# Altium PCB board.PcbDoc (part 3 of 3)
Units mil, origin at the board's own origin, x right, y up, seen from the top; angles counter-clockwise.
Board outline 6000 x 4000 mil, 2 copper layers (Top Layer, Bottom Layer); 112 components, 157 nets, 575 pads, 180 vias.
Unrouted connection lines stored in the file: 1.
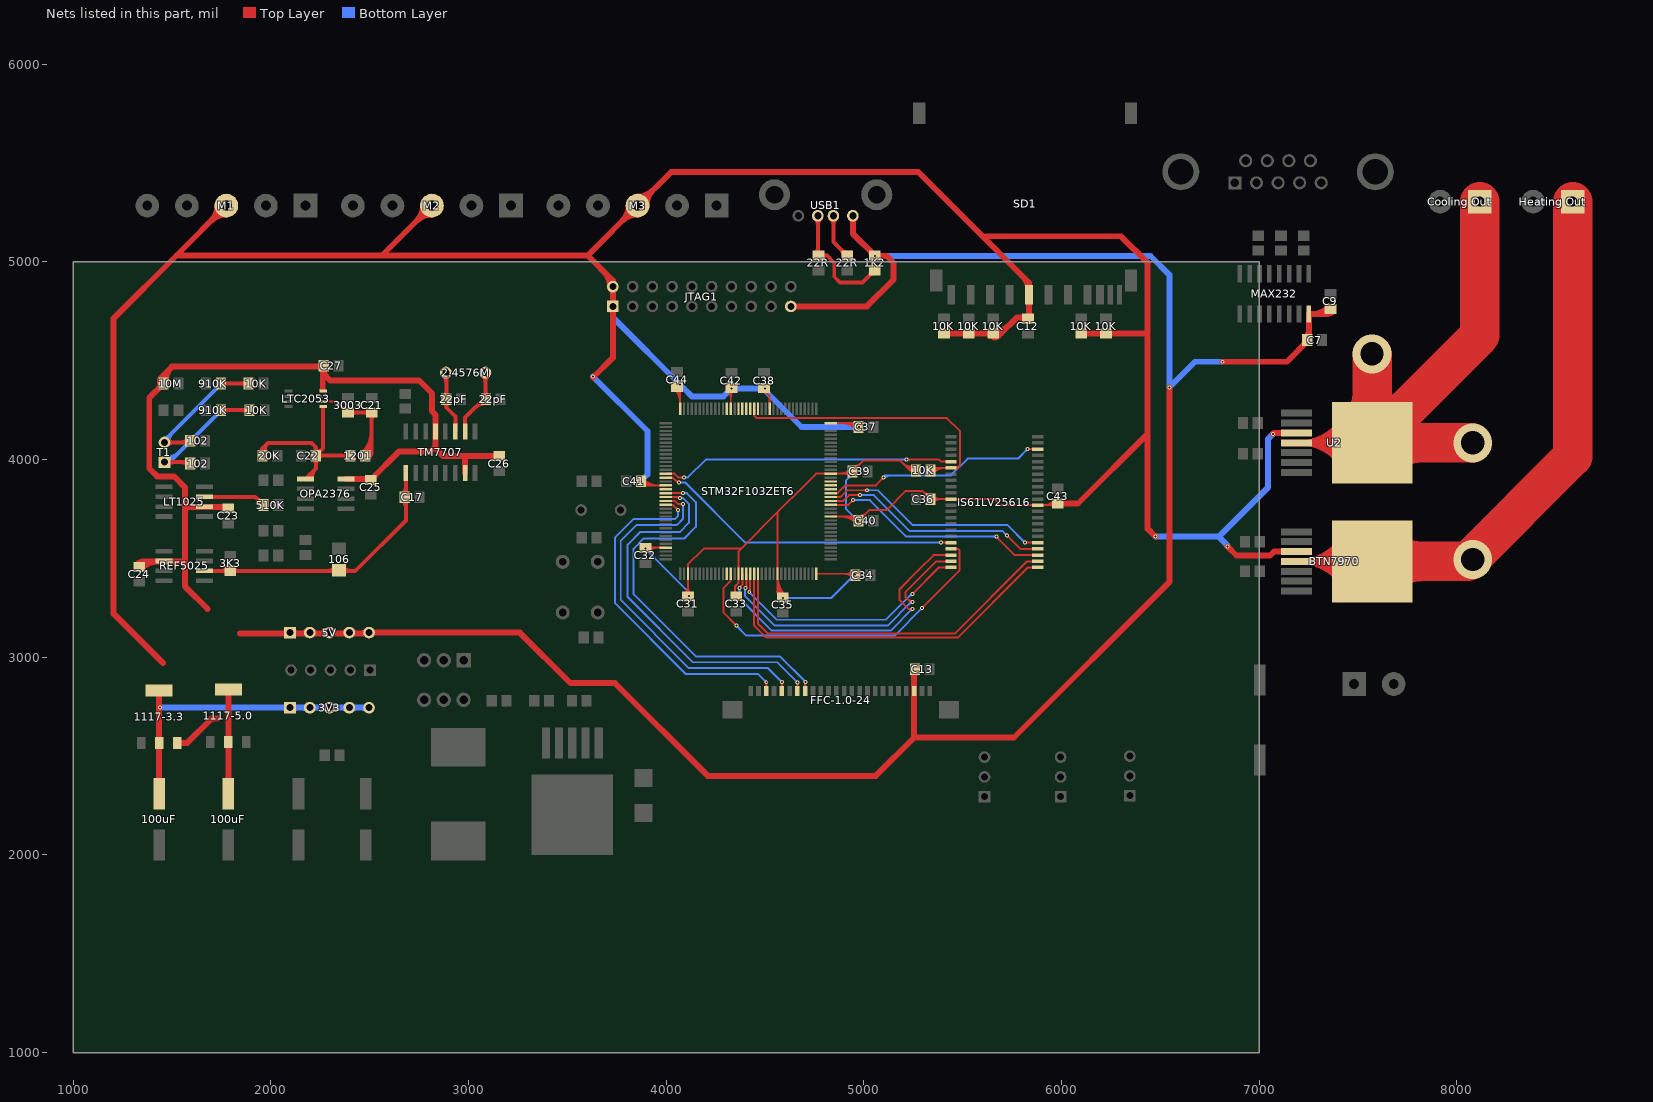
[diagram p3: the nets of this part, all layers, seen from the top]

## Via types
v1: diameter 20, hole 10, Top Layer to Bottom Layer, 173 vias
v2: diameter 196.85, hole 118.11, Top Layer to Bottom Layer, 7 vias

## Nets (pads, with @x,y where several pads share a name; then routed paths per layer and width w, separated by ;. In a path a pad name is that pad's centre, name@x,y a point inside that pad or via, vN(x,y) a via of type N, cw(c..) or ccw(c..) an arc to the next point about the centre after c; other vN are vias at no path point) (continued)
PF4: IS61LV25616.5 STM32F103ZET6.14 | length 1582.5
  Top Layer w10: STM32F103ZET6.14@3997.68,3928.58 4041.42,3928.58 4060,3910 v1(4090,3910) ; v1@4086.46,3906.46 ccw(c4077.93,3897.93) 4077.93,3910 ccw(c4077.93,3922.07) v1@4086.46,3913.54 ; v1(5215,4000) 5380,4000 5390.28,3989.72 IS61LV25616.5@5440.51,3989.72 ; v1@5218.54,3996.46 cw(c5227.07,3987.93) 5227.07,4000 cw(c5227.07,4012.07) v1@5218.54,4003.54 ; IS61LV25616.5@5418.1,3987 ccw(c5411.51,3980.41) 5411.51,3989.72 ccw(c5411.51,3999.04) IS61LV25616.5@5418.1,3992.45
  Bottom Layer w10: v1(4090,3910) 4110,3910 4200,4000 v1(5215,4000) ; v1@4093.54,3906.46 cw(c4102.07,3897.93) 4102.07,3910 cw(c4102.07,3922.07) v1@4093.54,3913.54 ; v1@5211.46,3996.46 ccw(c5202.93,3987.93) 5202.93,4000 ccw(c5202.93,4012.07) v1@5211.46,4003.54
PF5: IS61LV25616.18 STM32F103ZET6.15 | length 1691.1
  Top Layer w10: STM32F103ZET6.15@3997.68,3908.9 4032.36,3908.9 4056.26,3885 v1(4065,3885) ; STM32F103ZET6.15@4023.49,3908.02 cw(c4026.99,3894.42) 4036.91,3904.35 ; 4041.55,3899.71 ccw(c4065,3923.17) v1@4065,3890 ; v1(5390.28,3580.28) IS61LV25616.18@5440.51,3580.28 ; v1@5393.81,3576.74 cw(c5402.35,3568.2) 5402.35,3580.28 cw(c5402.35,3592.35) v1@5393.81,3583.81 ; IS61LV25616.18@5418.1,3577.55 ccw(c5411.51,3570.96) 5411.51,3580.28 ccw(c5411.51,3589.59) IS61LV25616.18@5418.1,3583
  Bottom Layer w10: v1(4065,3885) 4095,3885 4399.72,3580.28 v1(5390.28,3580.28) ; v1@4068.54,3881.46 cw(c4077.07,3872.93) 4077.07,3885 cw(c4077.07,3897.07) v1@4068.54,3888.54 ; v1@5386.74,3576.74 ccw(c5378.2,3568.2) 5378.2,3580.28 ccw(c5378.2,3592.35) v1@5386.74,3583.81
PF6: STM32F103ZET6.18
PF7: FFC-1.0-24.8 STM32F103ZET6.19 | length 2082.5
  Top Layer w10: STM32F103ZET6.19@3997.68,3830.16 4084.84,3830.16 v1(4085,3830) ; 4072.55,3830.16 cw(c4072.55,3817.55) v1@4081.46,3826.46 ; 4073.31,3830.16 ccw(c4073.31,3841.69) v1@4081.46,3833.54 ; FFC-1.0-24.8@4698.18,2847.57 ccw(c4686.55,2859.2) 4702.99,2859.2 ccw(c4719.44,2859.2) FFC-1.0-24.8@4707.81,2847.57 ; FFC-1.0-24.8@4702.99,2828.98 v1@4702.99,2872.99 ; 4702.99,2858.08 cw(c4721.92,2858.08) v1@4708.54,2871.46
  Bottom Layer w10: v1(4085,3830) 4105,3830 4150,3785 4150,3660 4090,3600 3885,3600 3835,3550 3835,3320 4150,3005 4575,3005 v1(4705,2875) ; v1@4088.54,3826.46 cw(c4097.07,3817.93) 4097.07,3830 cw(c4097.07,3842.07) v1@4088.54,3833.54 ; v1@4700,2875 ccw(c4687.93,2875) 4696.46,2883.54 ccw(c4705,2892.07) v1@4705,2880
PF8: FFC-1.0-24.7 STM32F103ZET6.20 | length 2037
  Top Layer w10: STM32F103ZET6.20@3997.68,3810.47 4064.53,3810.47 v1(4070,3805) ; 4044.72,3810.47 cw(c4044.72,3779.72) v1@4066.46,3801.46 ; FFC-1.0-24.7@4658.81,2847.57 ccw(c4647.18,2859.2) 4663.62,2859.2 ccw(c4680.07,2859.2) FFC-1.0-24.7@4668.44,2847.57 ; v1@4660.09,2870.09 cw(c4651.55,2861.55) 4663.62,2861.55 cw(c4675.69,2861.55) v1@4667.16,2870.09 ; FFC-1.0-24.7@4663.62,2828.98 v1(4663.62,2873.62)
  Bottom Layer w10: v1(4070,3805) 4086.11,3805 4115,3776.11 4115,3680 4070,3635 3870,3635 3805,3570 3805,3305 4135,2975 4562.24,2975 v1(4663.62,2873.62) ; v1@4073.54,3801.46 cw(c4082.07,3792.93) 4082.07,3805 cw(c4082.07,3817.07) v1@4073.54,3808.54 ; v1@4658.62,2873.62 ccw(c4646.55,2873.62) 4655.09,2882.16 ccw(c4663.62,2890.69) v1@4663.62,2878.62
PF9: FFC-1.0-24.5 STM32F103ZET6.21 | length 1964.1
  Top Layer w10: STM32F103ZET6.21@3997.68,3790.79 4044.21,3790.79 4060,3775 v1(4085,3775) ; v1@4081.46,3771.46 ccw(c4072.93,3762.93) 4072.93,3775 ccw(c4072.93,3787.07) v1@4081.46,3778.54 ; FFC-1.0-24.5@4580.07,2847.57 ccw(c4568.44,2859.2) 4584.88,2859.2 ccw(c4601.33,2859.2) FFC-1.0-24.5@4589.7,2847.57 ; v1@4581.46,2871.46 cw(c4573.21,2863.21) 4584.88,2863.21 ; FFC-1.0-24.5@4584.88,2828.98 4584.88,2874.88 v1(4585,2875) ; 4584.88,2862.64 cw(c4597.36,2862.64) v1@4588.54,2871.46
  Bottom Layer w10: v1@4081.46,3771.46 cw(c4072.93,3762.93) 4085,3762.93 cw(c4097.07,3762.93) v1@4088.54,3771.46 ; v1(4085,3775) 4085,3700 4055,3670 3850,3670 3770,3590 3770,3290 4115,2945 4515,2945 v1(4585,2875) ; v1@4580,2875 ccw(c4567.93,2875) 4576.46,2883.54 ccw(c4585,2892.07) v1@4585,2880
PF10: FFC-1.0-24.3 STM32F103ZET6.22 | length 1894.6
  Top Layer w10: STM32F103ZET6.22@3997.68,3771.1 4033.9,3771.1 v1(4060,3745) ; STM32F103ZET6.22@4023.48,3770.22 cw(c4027.39,3753.96) 4039.21,3765.79 ; v1@4055,3745 ccw(c4042.93,3745) 4051.46,3753.54 ccw(c4060,3762.07) v1@4060,3750 ; FFC-1.0-24.3@4501.33,2847.57 ccw(c4489.7,2859.2) 4506.14,2859.2 ccw(c4522.59,2859.2) FFC-1.0-24.3@4510.96,2847.57 ; v1@4502.61,2870.32 cw(c4494.07,2861.79) 4506.14,2861.79 cw(c4518.21,2861.79) v1@4509.68,2870.32 ; FFC-1.0-24.3@4506.14,2828.98 v1(4506.14,2873.86)
  Bottom Layer w10: v1@4056.46,3741.46 cw(c4047.93,3732.93) 4060,3732.93 cw(c4072.07,3732.93) v1@4063.54,3741.46 ; v1(4060,3745) 4060,3715 4045,3700 3835,3700 3740,3605 3740,3275 4100,2915 4465,2915 v1(4506.14,2873.86) ; v1@4501.14,2873.86 ccw(c4489.07,2873.86) 4497.61,2882.39 ccw(c4506.14,2890.93) v1@4506.14,2878.86
PF11: STM32F103ZET6.49
PF12: IS61LV25616.19 STM32F103ZET6.50 | length 1842.9
  Top Layer w10: STM32F103ZET6.50@4326.42,3422.68 4326.42,3387.99 4290,3351.57 4290,3225.51 v1(4355.51,3160) ; v1@4350.51,3160 ccw(c4338.44,3160) 4346.97,3168.54 ccw(c4355.51,3177.07) v1@4355.51,3165 ; v1(5295,3250) 5405,3360 ; v1@5295,3255 ccw(c5295,3267.07) 5303.54,3258.54 ccw(c5312.07,3250) v1@5300,3250 ; 5415,3370 5405,3360 ; IS61LV25616.19@5440.51,3548.78 5476.22,3548.78 5483,3542 5483,3438 5405,3360 ; IS61LV25616.19@5462.93,3546.05 cw(c5469.51,3539.47) 5469.51,3548.78 cw(c5469.51,3558.09) IS61LV25616.19@5462.93,3551.51
  Bottom Layer w10: v1@4355.51,3155 cw(c4355.51,3142.93) 4364.04,3151.46 cw(c4372.58,3160) v1@4360.51,3160 ; v1(4355.51,3160) 4405.51,3110 5155,3110 v1(5295,3250) ; v1@5290,3250 cw(c5277.93,3250) 5286.46,3241.46 cw(c5295,3232.93) v1@5295,3245
PF13: IS61LV25616.20 STM32F103ZET6.53 | length 1686.1
  Top Layer w10: v1(4370,3351.11) 4385.47,3366.58 STM32F103ZET6.53@4385.47,3422.68 ; v1@4370,3356.11 ccw(c4370,3368.18) 4378.54,3359.65 ccw(c4387.07,3351.11) v1@4375,3351.11 ; v1@5241.46,3241.46 ccw(c5232.93,3232.93) 5232.93,3245 ccw(c5232.93,3257.07) v1@5241.46,3248.54 ; v1(5245,3245) 5225,3245 5180,3290 5180,3345 5280,3445 ; 5275,3440 5280,3445 ; IS61LV25616.20@5418.1,3514.56 ccw(c5411.51,3507.97) 5411.51,3517.28 ccw(c5411.51,3526.6) IS61LV25616.20@5418.1,3520.01 ; IS61LV25616.20@5440.51,3517.28 5352.28,3517.28 5280,3445
  Bottom Layer w10: v1@4366.46,3347.58 cw(c4357.93,3339.04) 4370,3339.04 cw(c4382.07,3339.04) v1@4373.54,3347.58 ; v1(4370,3351.11) 4370,3300 4535,3135 5135,3135 v1(5245,3245) ; v1@5240,3245 cw(c5227.93,3245) 5236.46,3236.46 cw(c5245,3227.93) v1@5245,3240
PF14: IS61LV25616.21 STM32F103ZET6.54 | length 1519.8
  Top Layer w10: v1(4400,3350) 4405.16,3355.16 STM32F103ZET6.54@4405.16,3422.68 ; 5219.39,3295.61 ccw(c5245,3321.21) v1@5245,3285 ; v1(5245,3280) 5235,3280 5210,3305 5210,3330 5310,3430 ; 5305,3425 5310,3430 ; IS61LV25616.21@5418.1,3483.06 ccw(c5411.51,3476.47) 5411.51,3485.79 ccw(c5411.51,3495.1) IS61LV25616.21@5418.1,3488.52 ; IS61LV25616.21@5440.51,3485.79 5365.79,3485.79 5310,3430
  Bottom Layer w10: 4398,3333.1 cw(c4416.9,3333.1) v1@4403.54,3346.46 ; v1@4398,3348 4398,3312 4550,3160 5120,3160 5240,3280 v1(5245,3280) ; 5227.93,3267.93 cw(c5245,3250.86) v1@5245,3275
PF15: IS61LV25616.22 STM32F103ZET6.55 | length 1438
  Top Layer w10: v1@4416.46,3333.54 ccw(c4396.24,3353.76) 4424.84,3353.76 ; v1(4420,3330) 4424.84,3334.84 STM32F103ZET6.55@4424.84,3422.68 ; 5275,3350 v1(5245,3320) 5379.29,3454.29 IS61LV25616.22@5440.51,3454.29 ; IS61LV25616.22@5418.1,3451.56 ccw(c5411.51,3444.98) 5411.51,3454.29 ccw(c5411.51,3463.61) IS61LV25616.22@5418.1,3457.02 ; 5253.54,3328.54 ccw(c5262.07,3320) 5250,3320 cw(c5262.07,3320) 5253.54,3328.54 ; 5253.54,3328.54 cw(c5245,3337.07) 5245,3325 ccw(c5245,3337.07) 5253.54,3328.54
  Bottom Layer w10: v1@4420,3325 cw(c4420,3312.93) 4428.54,3321.46 cw(c4437.07,3330) v1@4425,3330 ; v1(4420,3330) 4560,3190 5110,3190 5240,3320 v1(5245,3320) ; 5227.93,3307.93 cw(c5245,3290.86) v1@5245,3315
PG0: IS61LV25616.23 STM32F103ZET6.56 | length 1882.9
  Top Layer w10: 4444.53,3160.47 STM32F103ZET6.56@4444.53,3422.68 ; 4445,3160 4505,3100 5475,3100 5829.29,3454.29 IS61LV25616.23@5879.49,3454.29 ; IS61LV25616.23@5857.07,3451.56 ccw(c5850.49,3444.98) 5850.49,3454.29 ccw(c5850.49,3463.61) IS61LV25616.23@5857.07,3457.02
PG1: IS61LV25616.24 STM32F103ZET6.57 | length 1849.1
  Top Layer w10: STM32F103ZET6.57@4464.21,3422.68 4464.21,3170.79 4515,3120 5460,3120 5825,3485 5878.7,3485 IS61LV25616.24@5879.49,3485.79 ; 5848.59,3485 ccw(c5848.59,3497) IS61LV25616.24@5857.07,3488.52
PG2: IS61LV25616.25 STM32F103ZET6.87 | length 1262.6
  Top Layer w10: STM32F103ZET6.87@4832.32,3771.1 4921.1,3771.1 v1(4945,3795) ; v1@4940,3795 cw(c4927.93,3795) 4936.46,3786.46 cw(c4945,3777.93) v1@4945,3790 ; v1@5670,3605 cw(c5670,3592.93) 5678.54,3601.46 cw(c5687.07,3610) v1@5675,3610 ; v1(5670,3610) 5762.72,3517.28 IS61LV25616.25@5879.49,3517.28 ; IS61LV25616.25@5857.07,3514.56 ccw(c5850.49,3507.97) 5850.49,3517.28 ccw(c5850.49,3526.6) IS61LV25616.25@5857.07,3520.01
  Bottom Layer w10: v1(4945,3795) 5030,3795 5215,3610 v1(5670,3610) ; v1@4948.54,3791.46 cw(c4957.07,3782.93) 4957.07,3795 cw(c4957.07,3807.07) v1@4948.54,3798.54 ; v1@5666.46,3606.46 ccw(c5657.93,3597.93) 5657.93,3610 ccw(c5657.93,3622.07) v1@5666.46,3613.54
PG3: IS61LV25616.26 STM32F103ZET6.88 | length 1262.1
  Top Layer w10: STM32F103ZET6.88@4832.32,3790.79 4895.79,3790.79 4925,3820 v1(4980,3820) ; v1@4976.46,3816.46 ccw(c4967.93,3807.93) 4967.93,3820 ccw(c4967.93,3832.07) v1@4976.46,3823.54 ; v1@5725,3610 cw(c5725,3597.93) 5733.54,3606.46 cw(c5742.07,3615) v1@5730,3615 ; v1(5725,3615) 5791.22,3548.78 IS61LV25616.26@5879.49,3548.78 ; IS61LV25616.26@5857.07,3546.05 ccw(c5850.49,3539.47) 5850.49,3548.78 ccw(c5850.49,3558.09) IS61LV25616.26@5857.07,3551.51
  Bottom Layer w10: v1(4980,3820) 5050,3820 5230,3640 5700,3640 v1(5725,3615) ; v1@4983.54,3816.46 cw(c4992.07,3807.93) 4992.07,3820 cw(c4992.07,3832.07) v1@4983.54,3823.54 ; v1@5720,3615 ccw(c5707.93,3615) 5716.46,3623.54 ccw(c5725,3632.07) v1@5725,3620
PG4: IS61LV25616.27 STM32F103ZET6.89 | length 1261.4
  Top Layer w10: STM32F103ZET6.89@4832.32,3810.47 4880.47,3810.47 4915,3845 v1(5015,3845) ; v1@5011.46,3841.46 ccw(c5002.93,3832.93) 5002.93,3845 ccw(c5002.93,3857.07) v1@5011.46,3848.54 ; v1@5815.28,3580.28 IS61LV25616.27@5879.49,3580.28 ; v1@5818.54,3576.46 cw(c5827.74,3567.26) 5827.74,3580.28 ; v1@5818.54,3583.54 ccw(c5826.4,3591.4) 5826.4,3580.28 ; IS61LV25616.27@5857.07,3577.55 ccw(c5850.49,3570.96) 5850.49,3580.28 ccw(c5850.49,3589.59) IS61LV25616.27@5857.07,3583
  Bottom Layer w10: v1(5015,3845) 5070,3845 5245,3670 5725,3670 v1(5815,3580) ; v1@5018.54,3841.46 cw(c5027.07,3832.93) 5027.07,3845 cw(c5027.07,3857.07) v1@5018.54,3848.54 ; v1@5810,3580 ccw(c5797.93,3580) 5806.46,3588.54 ccw(c5815,3597.07) v1@5815,3585
PG5: IS61LV25616.42 STM32F103ZET6.90 | length 1292.3
  Top Layer w10: STM32F103ZET6.90@4832.32,3830.16 4834.1,3831.94 4868.79,3831.94 ; STM32F103ZET6.90@4858.42,3830.91 ccw(c4862.98,3837.75) 4868.79,3831.94 ; STM32F103ZET6.90@4858.55,3829.52 cw(c4864.39,3823.68) 4864.39,3831.94 ; 5055,3870 5045,3870 ; v1@5095,3910 cw(c5082.93,3910) 5091.46,3901.46 cw(c5100,3892.93) v1@5100,3905 ; v1(5100,3910) 5060,3870 5045,3870 ; v1(5827.28,4052.72) IS61LV25616.42@5879.49,4052.72 ; v1@5830.82,4049.18 cw(c5839.36,4040.64) 5839.36,4052.72 cw(c5839.36,4064.79) v1@5830.82,4056.25 ; IS61LV25616.42@5857.07,4049.99 ccw(c5850.49,4043.4) 5850.49,4052.72 ccw(c5850.49,4062.03) IS61LV25616.42@5857.07,4055.44 ; 4868.79,3831.94 4906.85,3870 5045,3870
  Bottom Layer w10: v1@5096.46,3913.54 cw(c5112.07,3897.93) 5112.07,3920 ; v1(5100,3910) 5110,3920 5440,3920 5525,4005 5779.57,4005 v1(5827.28,4052.72) ; v1@5103.54,3906.46 cw(c5136.21,3873.79) 5136.21,3920 ; v1@5822.28,4052.72 cw(c5810.21,4052.72) 5818.75,4044.18 cw(c5827.28,4035.64) v1@5827.28,4047.72
PG6: STM32F103ZET6.91
PG7: STM32F103ZET6.92
PG8: STM32F103ZET6.93
PG9: STM32F103ZET6.124
PG10: 10K.2@5337.4,3945 IS61LV25616.6 STM32F103ZET6.125 | length 1664.4
  Top Layer w10: STM32F103ZET6.125@4443.89,4231.09 cw(c4438.05,4225.25) 4446.31,4225.25 ; STM32F103ZET6.125@4444.53,4257.32 4446.31,4255.54 4446.31,4220.86 4457.16,4210 5420,4210 5485,4145 5485,3970 ; 10K.2@5337.4,3945 5350.63,3958.23 IS61LV25616.6@5440.51,3958.23 5473.23,3958.23 5485,3970 ; 10K.2@5337.82,3948.52 cw(c5361.26,3925.08) 10K.2@5361.26,3958.23 ; 10K.2@5344.89,3941.45 cw(c5385.4,3900.94) 5385.4,3958.23 ; 10K.2@5351.96,3934.38 cw(c5409.54,3876.8) 5409.54,3958.23 ; 10K.2@5351.96,3963.5 ccw(c5364.68,3976.22) 5364.68,3958.23 ; IS61LV25616.6@5418.1,3955.5 ccw(c5411.51,3948.91) 5411.51,3958.23 ccw(c5411.51,3967.54) IS61LV25616.6@5418.1,3960.96 ; IS61LV25616.6@5459.28,3952.16 ccw(c5461.33,3965.69) 5471.01,3956.01 ; IS61LV25616.6@5460.78,3962.04 ccw(c5465.02,3989.98) 5485,3970 ; IS61LV25616.6@5462.93,3955.5 cw(c5469.51,3948.91) 5469.51,3958.23 cw(c5469.51,3967.54) IS61LV25616.6@5462.93,3960.96
PG11: STM32F103ZET6.126
PG12: STM32F103ZET6.127
PG13: STM32F103ZET6.128
PG14: STM32F103ZET6.129
PG15: STM32F103ZET6.132
PWR: 
RED: 10K.1@1892.6,4250 102.2@1592.6,3980 910K.1@1747.4,4250 T1.1 | length 1058
  Top Layer w20: T1.1@1462,3987 1585.6,3987 102.2@1592.6,3980 ; T1.1@1475.81,3973.19 cw(c1509.14,3939.86) 1509.14,3987 cw(c1509.14,4034.14) T1.1@1475.81,4000.81 ; 1547.56,3987 cw(c1547.56,3938.9) 102.2@1581.57,3972.91 ; 1562.35,3987 ccw(c1562.35,4014.18) 102.2@1581.57,3994.96 ; 910K.1@1747.4,4250 10K.1@1892.6,4250 ; 910K.1@1758.43,4238.98 cw(c1785.04,4212.36) 1785.04,4250 cw(c1785.04,4287.64) 910K.1@1758.43,4261.02 ; 10K.1@1881.57,4238.98 ccw(c1854.96,4212.36) 1854.96,4250 ccw(c1854.96,4287.64) 10K.1@1881.57,4261.02
  Bottom Layer w20: T1.1@1462,3986.53 ccw(c1462,4045.74) 1503.87,4003.87 ; T1.1@1462,3987 1487,3987 v1(1750,4250) ; T1.1@1462,4006.53 ccw(c1462,4114.03) 1538.01,4038.01
REF: 20K.1 1201.1 C22.1 LTC2053.5 OPA2376.1 | length 1473.8
  Top Layer w20: 20K.1@1947.52,4035.83 ccw(c1929.06,4057.6) 1957.6,4057.6 ; 20K.1@1953.44,4022.47 cw(c1989.8,4035.28) 1962.54,4062.54 ; 20K.1@1957.6,4020 1957.6,4057.6 ; 20K.1@1967.68,4035.83 cw(c1986.14,4057.6) 1957.6,4057.6 ; 20K.1@1972.3,4029.12 cw(c2023.02,4046.98) 1985,4085 ; OPA2376.1@2174.64,3902 2227.4,3954.76 ; OPA2376.1@2188,3900.6 cw(c2217.78,3902.9) 2196.66,3924.02 ; OPA2376.1@2207.94,3902.14 cw(c2274.86,3907.3) 2227.4,3954.76 ; C22.1@2216.38,4005.04 cw(c2189.76,3978.42) 2227.4,3978.42 cw(c2265.04,3978.42) C22.1@2238.43,4005.04 ; C22.1@2216.38,4034.96 ccw(c2189.76,4061.58) 2227.4,4061.58 ccw(c2265.04,4061.58) C22.1@2238.43,4034.96 ; C22.1@2227.4,4039.53 ccw(c2227.4,4086.67) 2260.74,4053.34 ; C22.1@2238.43,4008.98 cw(c2265.04,3982.36) 2265.04,4020 cw(c2265.04,4057.64) C22.1@2238.43,4031.02 ; C22.1@2242.99,4023.94 cw(c2271.13,4023.94) C22.1@2251.23,4043.83 ; 2265,4260 2265,4057.6 C22.1@2227.4,4020 ; 1201.1@2391.57,4008.98 ccw(c2364.96,3982.36) 2364.96,4020 ccw(c2364.96,4057.64) 1201.1@2391.57,4031.02 ; 1201.1@2402.6,4020 C22.1@2227.4,4020 ; 1957.6,4057.6 1985,4085 ; 1985,4085 2205,4085 2227.4,4062.6 C22.1@2227.4,4020 ; 2227.4,3954.76 C22.1@2227.4,4020
RG: 1201.2 3003.1 C21.2 LTC2053.6 | length 1077.9
  Top Layer w10: LTC2053.6@2265,4294.8 2332.8,4294.8 3003.1@2390,4237.6 ; 2348.13,4279.47 cw(c2306.26,4237.6) 3003.1@2365.47,4237.6 ; 2357.63,4269.96 ccw(c2386.06,4298.39) 3003.1@2386.06,4258.19 ; 3003.1@2365.2,4262.4 cw(c2340.4,4237.6) 3003.1@2375.47,4237.6
  Top Layer w20: 3003.1@2390,4237.6 C21.2@2510,4237.6 2510,4052.6 ; 3003.1@2404.96,4226.57 cw(c2431.58,4199.96) 2431.58,4237.6 cw(c2431.58,4275.24) 3003.1@2404.96,4248.62 ; 1201.2@2466.38,4034.96 ccw(c2361.06,4140.27) 2510,4140.27 ; 1201.2@2477.4,4020 2510,4052.6 ; 1201.2@2477.67,4039.53 ccw(c2478.43,4084.17) 2510,4052.6 ; 1201.2@2480.52,4020.82 ccw(c2409.35,4091.99) 2510,4091.99 ; 1201.2@2492.99,4023.94 cw(c2521.13,4023.94) 1201.2@2501.23,4043.83 ; 1201.2@2494.66,4006.68 ccw(c2457.63,4043.71) 2510,4043.71 ; C21.2@2495.04,4226.57 ccw(c2468.42,4199.96) 2468.42,4237.6 ccw(c2468.42,4275.24) C21.2@2495.04,4248.62 ; C21.2@2498.98,4226.57 cw(c2472.36,4199.96) 2510,4199.96 cw(c2547.64,4199.96) C21.2@2521.02,4226.57
T_D_O: "Cooling Out.1" U2.4 U2.8 | length 6074.6
  Top Layer w20: U2.4@7188.46,4085 U2.8@7571.34,4085 ; U2.4@7254.94,4079.54 cw(c7268.12,4066.37) 7268.12,4085 cw(c7268.12,4103.63) U2.4@7254.94,4090.46 ; U2.8@7416.49,3970.2 ccw(c7188.49,3801.17) U2.4@7188.46,4085 ccw(c7188.49,4368.83) U2.8@7416.49,4199.8 ; U2.8@7432.56,3982.11 ccw(c7228.21,3830.62) 7228.21,4085 ccw(c7228.21,4339.38) U2.8@7432.56,4187.89 ; U2.8@7448.63,3994.03 ccw(c7267.93,3860.07) 7267.93,4085 ccw(c7267.93,4309.93) U2.8@7448.63,4175.97 ; U2.8@7464.69,4005.94 ccw(c7307.66,3889.52) 7307.66,4085 ccw(c7307.66,4280.48) U2.8@7464.69,4164.06 ; U2.8@7480.76,4017.85 ccw(c7347.38,3918.97) 7347.38,4085 ccw(c7347.38,4251.03) U2.8@7480.76,4152.15
  Top Layer w200: U2.8@7498.68,4161.6 ccw(c7323.26,4337.01) 7571.34,4337.01 ccw(c7819.41,4337.01) U2.8@7644,4161.6 ; U2.8@7571.34,4191.69 ccw(c7571.34,4449.27) U2.8@7753.47,4267.14 ; v2@7571.34,4531.34 U2.8@7571.34,4085 ; U2.8@7644,4012.34 cw(c7819.41,3836.93) 7819.41,4085 cw(c7819.41,4333.07) U2.8@7644,4157.66 ; U2.8@7674.09,4088.94 cw(c7912.66,4088.94) U2.8@7743.97,4257.63 ; v2@8075,4085 U2.8@7571.34,4085 ; 8115,5305 8115,4628.66 U2.8@7571.34,4085
  other v2: 8080,4085 7570,4535
T_U_O: "Heating Out.1" BTN7970.4 BTN7970.8 | length 5423.3
  Top Layer w20: BTN7970.4@7188.46,3485 BTN7970.8@7571.34,3485 ; BTN7970.4@7254.94,3479.54 cw(c7268.12,3466.37) 7268.12,3485 cw(c7268.12,3503.63) BTN7970.4@7254.94,3490.46 ; BTN7970.8@7416.49,3370.2 ccw(c7188.49,3201.17) BTN7970.4@7188.46,3485 ccw(c7188.49,3768.83) BTN7970.8@7416.49,3599.8 ; BTN7970.8@7432.56,3382.11 ccw(c7228.21,3230.62) 7228.21,3485 ccw(c7228.21,3739.38) BTN7970.8@7432.56,3587.89 ; BTN7970.8@7448.63,3394.03 ccw(c7267.93,3260.07) 7267.93,3485 ccw(c7267.93,3709.93) BTN7970.8@7448.63,3575.97 ; BTN7970.8@7464.69,3405.94 ccw(c7307.66,3289.52) 7307.66,3485 ccw(c7307.66,3680.48) BTN7970.8@7464.69,3564.06 ; BTN7970.8@7480.76,3417.85 ccw(c7347.38,3318.97) 7347.38,3485 ccw(c7347.38,3651.03) BTN7970.8@7480.76,3552.15
  Top Layer w200: BTN7970.8@7571.34,3485 8055,3485 8585,4015 8585,5305 ; BTN7970.8@7644,3412.34 cw(c7819.41,3236.93) 7819.41,3485 cw(c7819.41,3733.07) BTN7970.8@7644,3557.66
  other v2: 8080,3495
USB_D+: 1K2.2 22R.2@4770,5032.4 USB1.3 | length 1065.4
  Top Layer w20: 22R.2@4755.04,5043.43 ccw(c4726.24,5072.23) 4766.97,5072.23 ; 4766.97,5067.86 ccw(c4801.52,5067.86) 22R.2@4777.09,5043.43 ; 4766.97,5104.37 USB1.3@4766.97,5233.31 4766.97,5035.43 22R.2@4770,5032.4 4812.6,5032.4 4850,4995 4850,4925 4880,4895 4992.4,4895 1K2.2@5055,4957.6 ; 22R.2@4784.96,5021.38 cw(c4811.58,4994.76) 4811.58,5032.4 cw(c4811.58,5070.04) 22R.2@4784.96,5043.43 ; 5021.66,4924.26 ccw(c4988.33,4957.6) 1K2.2@5035.47,4957.6 ; 1K2.2@5031.17,4933.77 cw(c5051.06,4913.87) 1K2.2@5051.06,4942.01 ; 4766.97,5186.16 ccw(c4719.82,5186.16) 4753.16,5219.5 cw(c4719.82,5186.16) 4766.97,5186.16 ; 4766.97,5186.16 cw(c4814.11,5186.16) 4780.78,5219.5 ccw(c4814.11,5186.16) 4766.97,5186.16
USB_D-: 22R.2@4915,5032.4 USB1.2 | length 385
  Top Layer w20: USB1.2@4831.9,5219.5 cw(c4798.56,5186.16) 4845.71,5186.16 cw(c4892.85,5186.16) USB1.2@4859.52,5219.5 ; USB1.2@4845.71,5233.31 4845.71,5101.69 22R.2@4915,5032.4 22R.2@4930.71,5048.11 ; 4881.66,5065.74 cw(c4848.33,5032.4) 22R.2@4895.47,5032.4 ; 22R.2@4891.17,5056.23 ccw(c4911.06,5076.13) 22R.2@4911.06,5047.99
VCC: 1K2.1 5V.1 5V.2 5V.3 5V.4 5V.5 10M.2@1457.6,4385 100uF.1@1785,2310 1117-3.3.3 1117-5.0.2 1117-5.0.4 C7.2 C9.1 C13.2 C23.2 C24.2 C25.2 C26.2 C27.2 FFC-1.0-24.22 JTAG1.10 LT1025.2 LTC2053.8 MAX232.16 OPA2376.8 REF5025.2 TM7707.5 TM7707.15 USB1.1 | length 18087.6
  Top Layer w30: C24.2@1325.21,3471.13 cw(c1358.71,3437.63) 1358.71,3485 ; C24.2@1335,3457.4 1362.6,3485 1565,3485 ; C24.2@1346.43,3449.91 cw(c1431.13,3365.21) REF5025.2@1431.13,3485 ; C24.2@1349.53,3457.4 cw(c1384.6,3457.4) C24.2@1359.8,3482.2 ; 10M.2@1432.8,4360.2 cw(c1457.6,4335.4) 10M.2@1457.6,4370.47 ; 10M.2@1438.2,4388.27 cw(c1482.55,4389.79) 1451.17,4421.17 ; 10M.2@1468.18,4389.3 cw(c1576.96,4393.03) 1500,4470 ; 1117-3.3.3@1525.55,2567.13 1577.13,2567.13 1700,2690 1730,2690 ; 1680,3245 1565,3360 1565,3485 ; 1737.15,3760 cw(c1737.15,3708.49) C23.2@1773.57,3744.91 ; 1117-5.0.4@1774.03,2826.91 cw(c1747.55,2800.43) 1785,2800.43 cw(c1822.45,2800.43) 1117-5.0.4@1795.97,2826.91 ; 100uF.1@1774.73,2369.49 ccw(c1749.93,2394.29) 1785,2394.29 ccw(c1820.07,2394.29) 100uF.1@1795.27,2369.49 ; 100uF.1@1785,2310 1117-5.0.2@1785,2572.13 1117-5.0.4@1785,2837.87 ; C23.2@1785,3752.4 1777.4,3760 1565,3760 ; 1845,3120 5V.4@2415,3120 ; 2049.75,3120 ccw(c2049.75,3172.14) 5V.1@2086.62,3135.27 ; 5V.1@2107.16,3135.27 ccw(c2144.03,3172.14) 2144.03,3120 ; 2149.75,3120 ccw(c2149.75,3172.14) 5V.2@2186.62,3135.27 ; 5V.2@2207.16,3135.27 ccw(c2244.03,3172.14) 2244.03,3120 ; 2239.46,4470 ccw(c2239.46,4499.2) C27.2@2260.11,4478.55 ; 2249.75,3120 ccw(c2249.75,3172.14) 5V.3@2286.62,3135.27 ; 2260,4355 2262.6,4357.6 2262.6,4470 1500,4470 ; 2262.6,4433.42 cw(c2305.24,4433.42) C27.2@2275.09,4463.57 ; C27.2@2267.6,4475 2267.6,4432.4 2300,4400 2750,4400 2815,4335 2815,4245 2833,4227 TM7707.5@2833,4143.32 2833,4068 ; C27.2@2276.35,4465.11 ccw(c2306.16,4444.82) 2280.67,4419.33 ; 5V.3@2296.89,3120 2491.89,3120 5V.5@2496.89,3125 2690,3125 ; OPA2376.8@2379.36,3902 2509.6,3902 2647.6,4040 2805,4040 2833,4068 ; 5V.4@2407.16,3135.27 ccw(c2444.03,3172.14) 2444.03,3120 ; 2449.75,3120 ccw(c2449.75,3172.14) 5V.5@2486.62,3135.27 ; 2464.39,3902 cw(c2464.39,3860.73) C25.2@2493.57,3889.91 ; 5V.5@2507.16,3114.73 cw(c2531.96,3089.93) 2531.96,3125 cw(c2531.96,3160.07) 5V.5@2507.16,3135.27 ; C25.2@2519.53,3897.4 cw(c2554.6,3897.4) C25.2@2529.8,3922.2 ; 2615,3125 2690,3125 ; TM7707.15@2983,3932.69 2983,4015.4 2985,4017.4 ; C26.2@3155,4017.4 2985,4017.4 ; JTAG1.10@4630,4775 5015,4775 5150,4910 5150,4995 5115,5030 5057.4,5030 1K2.1@5055,5032.4 4944.13,5143.27 USB1.1@4944.13,5233.31 ; JTAG1.10@4640.27,4764.73 cw(c4665.07,4739.93) 4665.07,4775 cw(c4665.07,4810.07) JTAG1.10@4640.27,4785.27 ; USB1.1@4933.86,5223.04 cw(c4909.06,5198.24) 4944.13,5198.24 cw(c4979.21,5198.24) USB1.1@4954.41,5223.04 ; 1K2.1@5030.2,5057.2 cw(c5005.4,5032.4) 1K2.1@5040.47,5032.4 ; 1K2.1@5066.43,5039.89 ccw(c5090.3,5063.77) 5090.3,5030 ; 5254.17,2902.23 cw(c5291.43,2902.23) C13.2@5265.09,2928.57 ; C13.2@5254.17,2936.58 FFC-1.0-24.22@5254.17,2828.98 5254.17,2594.17 ; v1(6545,4365) 6545,3380 5759.17,2594.17 5254.17,2594.17 ; v1(6815,4495) 7140,4495 7251,4606 MAX232.16@7251,4735.64 ; C7.2@7222.07,4577.07 ccw(c7198.07,4601.06) C7.2@7232.01,4601.06 ; C7.2@7235.11,4616.43 ccw(c7196.75,4654.79) 7251,4654.79 ; MAX232.16@7255,4735.64 7333.04,4735.64 C9.1@7360,4762.6 ; 7265.41,4735.64 ccw(c7265.41,4853.25) C9.1@7348.57,4770.09 ; C9.1@7335.2,4737.8 ccw(c7310.4,4762.6) C9.1@7345.47,4762.6 ; 7337.83,4735.64 ccw(c7337.83,4780.83) C9.1@7369.79,4748.87 ; 1500,4470 1457.6,4427.6 10M.2@1457.6,4385 1385,4312.4 1385,3955 1425,3915 1510,3915 1565,3860 1565,3760 ; 1565,3485 1565,3760 ; 2690,3125 3260,3125 3515,2870 3740,2870 4210,2400 5060,2400 5254.17,2594.17 ; 2833,4068 2833,4057 2872.6,4017.4 2985,4017.4 ; 5V.3@2307.16,3135.27 ccw(c2344.03,3172.14) 2344.03,3120 cw(c2344.03,3172.14) 5V.3@2307.16,3135.27 ; 2349.75,3120 ccw(c2349.75,3172.14) 2386.62,3135.27 cw(c2349.75,3172.14) 2349.75,3120
  Bottom Layer w30: v1(5055,5030) 6450,5030 6545,4935 v1(6545,4365) 6675,4495 v1(6815,4495)
VDD: 3V3.1 3V3.2 3V3.3 3V3.4 3V3.5 10K.1@5262.6,3945 10K.2@5405,4637.6 10K.2@5530,4637.6 10K.2@5655,4637.6 10K.2@6100,4637.6 10K.2@6225,4637.6 100uF.1@1435,2310 1117-3.3.2 1117-3.3.4 BTN7970.3 C12.2 C31.2 C32.2 C33.2 C34.2 C35.2 C36.2 C37.2 C38.2 C39.2 C40.2 C41.2 C42.2 C43.2 C44.2 IS61LV25616.11 IS61LV25616.33 JTAG1.1 JTAG1.11 M1.3 M2.3 M3.3 SD1.4 STM32F103ZET6.17 STM32F103ZET6.33 STM32F103ZET6.39 STM32F103ZET6.52 STM32F103ZET6.62 STM32F103ZET6.72 STM32F103ZET6.84 STM32F103ZET6.95 STM32F103ZET6.108 STM32F103ZET6.121 STM32F103ZET6.131 STM32F103ZET6.144 U2.3 | length 27999.5
  Top Layer w10: C41.2@3870,3885 cw(c3870,3867.13) C41.2@3882.64,3879.77 ; C41.2@3872.4,3890 3892.87,3869.53 STM32F103ZET6.17@3997.68,3869.53 ; C41.2@3872.82,3886.48 ccw(c3913.75,3927.41) 3913.75,3869.53 ; C41.2@3879.89,3893.55 ccw(c3937.89,3951.55) 3937.89,3869.53 ; C41.2@3886.96,3900.62 ccw(c3962.03,3975.69) 3962.03,3869.53 ; C32.2@3890.83,3547.23 ccw(c3877.16,3538.16) 3877.16,3554.57 STM32F103ZET6.33@3997.68,3554.57 ; C32.2@3898.54,3546.46 cw(c3918.09,3526.91) C32.2@3918.09,3554.57 ; C32.2@3906.43,3544.91 cw(c3929.73,3521.61) 3929.73,3554.57 ; C32.2@3913.5,3537.84 cw(c3953.87,3497.47) 3953.87,3554.57 ; C32.2@3913.5,3566.96 ccw(c3943.42,3596.89) 3943.42,3554.57 ; C44.2@4044.38,4353.04 cw(c3981.28,4289.94) 4070.51,4289.94 ; C44.2@4051.45,4360.11 cw(c4005.42,4314.09) 4070.51,4314.09 ; C44.2@4058.52,4367.18 cw(c4029.57,4338.23) 4070.51,4338.23 ; STM32F103ZET6.144@4070.51,4257.32 C44.2@4070.51,4343.11 ; C31.2@4095.44,3321.96 ccw(c4060.57,3356.83) 4109.88,3356.83 ; C31.2@4109.88,3307.52 STM32F103ZET6.39@4109.88,3422.68 4109.88,3469.88 4190,3550 4380,3550 ; 4109.88,3333.25 ccw(c4135.85,3333.25) C31.2@4117.49,3314.89 ; 4109.88,3334.43 ccw(c4139.43,3334.43) C31.2@4118.54,3313.54 ; 4109.88,3357.4 ccw(c4159.99,3357.4) C31.2@4124.56,3321.96 ; C42.2@4311.5,4348.04 cw(c4275.5,4312.03) 4326.42,4312.03 ; C42.2@4318.57,4355.11 cw(c4299.64,4336.17) 4326.42,4336.17 ; STM32F103ZET6.131@4326.42,4257.32 C42.2@4326.42,4359.02 ; 4326.42,4313.75 cw(c4374.92,4313.75) C42.2@4340.62,4348.04 ; C42.2@4326.42,4339.28 cw(c4350.72,4339.28) C42.2@4333.54,4356.46 ; C33.2@4355,3307.4 4348,3314.4 4348,3360.23 4365.79,3378.01 STM32F103ZET6.52@4365.79,3422.68 4365.79,3535.79 4380,3550 ; C38.2@4495,4362.6 4495,4350 4523.27,4321.73 STM32F103ZET6.121@4523.27,4257.32 ; C38.2@4495.03,4360.5 ccw(c4515.19,4358.47) C38.2@4500.86,4344.14 ; C38.2@4504.97,4359.5 ccw(c4542.28,4355.74) 4515.77,4329.23 ; C38.2@4506.89,4355.6 ccw(c4516.8,4346.88) C38.2@4507.46,4337.54 ; C38.2@4514.39,4348.99 ccw(c4524.82,4339.82) 4515,4330 ; 4562.64,3336.24 ccw(c4619.9,3336.24) C35.2@4579.41,3295.75 ; 4562.64,3360.38 ccw(c4644.04,3360.38) C35.2@4586.48,3302.82 ; 4562.64,3384.52 ccw(c4668.18,3384.52) C35.2@4593.55,3309.89 ; STM32F103ZET6.62@4562.64,3408.66 ccw(c4692.33,3408.66) C35.2@4600.62,3316.96 ; C35.2@4566.4,3308.52 ccw(c4544.32,3315.38) 4560.67,3331.73 ccw(c4582.13,3353.19) C35.2@4584.48,3322.93 ; C35.2@4579.77,3312.64 cw(c4567.13,3300) C35.2@4585,3300 ; C35.2@4590,3302.4 4562.64,3329.76 STM32F103ZET6.62@4562.64,3422.68 4562.64,3732.64 ; 4690,3860 4700,3870 ; STM32F103ZET6.72@4759.49,3422.68 4949.92,3422.68 C34.2@4957.6,3415 ; STM32F103ZET6.84@4832.32,3712.05 C40.2@4950.55,3712.05 ; STM32F103ZET6.108@4832.32,4184.49 4885,4184.49 ; 4874.83,3928.58 ccw(c4874.83,4003.83) C39.2@4928.04,3950.62 ; 4879.16,3712.05 cw(c4879.16,3600.5) C40.2@4958.04,3679.38 ; 4885.34,4184.49 cw(c4885.34,4081.68) C37.2@4958.04,4154.38 ; 4898.86,3422.68 cw(c4898.86,3360.2) C34.2@4943.04,3404.38 ; 4898.97,3928.58 ccw(c4898.97,3979.69) C39.2@4935.11,3943.55 ; 4902.21,3928.58 cw(c4902.21,3887.21) C39.2@4931.46,3916.46 ; 4903.31,3712.05 cw(c4903.31,3624.65) C40.2@4965.11,3686.45 ; 4909.49,4184.49 cw(c4909.49,4105.83) C37.2@4965.11,4161.45 ; 4910.95,3928.58 cw(c4910.95,3904.41) C39.2@4928.04,3921.5 ; 4916.92,3422.68 ccw(c4916.92,3459.62) C34.2@4943.04,3433.5 ; 4923,3422.68 cw(c4923,3384.34) C34.2@4950.11,3411.45 ; 4923.11,4184.49 4885,4184.49 ; C39.2@4926.35,3928.58 cw(c4926.35,3911.35) C39.2@4938.54,3923.54 ; 4927.45,3712.05 cw(c4927.45,3648.79) C40.2@4972.18,3693.52 ; C39.2@4931.18,3928.58 STM32F103ZET6.95@4832.32,3928.58 4758.58,3928.58 4700,3870 ; 4933.63,4184.49 cw(c4933.63,4129.97) C37.2@4972.18,4168.52 ; C34.2@4936.46,3422.68 cw(c4936.46,3401.46) C34.2@4951.46,3416.46 ; C39.2@4942.6,3940 4997.6,3995 5185,3995 5235,3945 ; C39.2@4942.6,3954.53 ccw(c4942.6,3989.6) C39.2@4967.4,3964.8 ; C39.2@4942.6,3964.53 ccw(c4942.6,4023.74) 4984.47,3981.87 ; C40.2@4951.59,3712.05 cw(c4951.59,3672.93) C40.2@4979.25,3700.59 ; C39.2@4963.19,3943.94 cw(c5003.39,3943.94) 4974.96,3972.37 ; C40.2@4970,3695 ccw(c4970,3713.34) C40.2@4982.97,3700.37 ; C40.2@4972.6,3690 5027.6,3745 5115,3745 5211.53,3841.53 5295.87,3841.53 C36.2@5337.4,3800 ; C40.2@4972.6,3704.53 ccw(c4972.6,3739.6) C40.2@4997.4,3714.8 ; C40.2@4972.6,3714.53 ccw(c4972.6,3773.74) 5014.47,3731.87 ; C37.2@4973.11,4184.49 4885,4184.49 ; C40.2@4993.19,3693.94 cw(c5033.39,3693.94) 5004.96,3722.37 ; 5200.77,3979.23 ccw(c5236.35,4014.81) 10K.1@5254.98,3968.07 ; 5211.51,3968.49 ccw(c5242.47,3999.45) 10K.1@5258.68,3958.78 ; 5222.25,3957.75 ccw(c5248.59,3984.09) 10K.1@5262.38,3949.49 ; 5232.99,3947.01 ccw(c5254.71,3968.73) 10K.1@5266.08,3940.2 ; 10K.1@5242.86,3939.14 ccw(c5235,3936.8) 5235,3945 ; 10K.1@5242.86,3950.86 cw(c5235,3953.2) 5235,3945 ; 10K.1@5262.6,3945 5235,3945 ; 5297.84,3839.56 ccw(c5334.29,3876) C36.2@5336.51,3824.51 ; 5305.04,3832.37 cw(c5276.61,3803.94) C36.2@5316.81,3803.94 ; C36.2@5313.93,3823.48 ccw(c5335.62,3845.17) C36.2@5336.95,3814.52 ; C36.2@5338.15,3800.75 IS61LV25616.11@5440.51,3800.75 5659.25,3800.75 5690.75,3769.25 IS61LV25616.33@5879.49,3769.25 C43.2@5971.65,3769.25 ; C36.2@5344.89,3792.51 cw(c5364.78,3772.63) 5364.78,3800.75 ; C36.2@5351.96,3785.44 cw(c5388.92,3748.48) 5388.92,3800.75 ; C36.2@5351.96,3814.56 ccw(c5385.31,3847.9) 5385.31,3800.75 ; IS61LV25616.11@5418.1,3798.02 ccw(c5411.51,3791.43) 5411.51,3800.75 ccw(c5411.51,3810.06) IS61LV25616.11@5418.1,3803.48 ; IS61LV25616.11@5462.93,3798.02 cw(c5469.51,3791.43) 5469.51,3800.75 cw(c5469.51,3810.06) IS61LV25616.11@5462.93,3803.48 ; IS61LV25616.33@5857.07,3766.52 ccw(c5850.49,3759.94) 5850.49,3769.25 ccw(c5850.49,3778.57) IS61LV25616.33@5857.07,3771.98 ; IS61LV25616.33@5901.9,3766.52 cw(c5908.49,3759.94) 5908.49,3769.25 cw(c5908.49,3778.57) IS61LV25616.33@5901.9,3771.98 ; IS61LV25616.33@5906.2,3769.25 ccw(c5906.2,3847.46) C43.2@5961.5,3792.16 ; 5930.35,3769.25 ccw(c5930.35,3823.31) C43.2@5968.57,3785.09 ; 5946.5,3769.25 cw(c5946.5,3748.04) C43.2@5961.5,3763.04 ; 4380,3550 4562.64,3732.64 ; 4562.64,3732.64 4700,3870
  Top Layer w30: 1117-3.3.4@1424.03,2821.91 cw(c1397.55,2795.43) 1435,2795.43 cw(c1472.45,2795.43) 1117-3.3.4@1445.97,2821.91 ; 100uF.1@1424.73,2369.49 ccw(c1399.93,2394.29) 1435,2394.29 ccw(c1470.07,2394.29) 100uF.1@1445.27,2369.49 ; 100uF.1@1430,2310 1435,2315 1117-3.3.2@1435,2567.13 1117-3.3.4@1435,2832.87 ; 1455,2970 1205,3220 1205,4715 1522.5,5032.5 ; M1.3@1730,5285 cw(c1621.36,5285) 1698.18,5208.18 cw(c1775,5131.36) M1.3@1775,5240 ; M1.3@1775,5285 1522.5,5032.5 ; M2.3@2770,5285 cw(c2661.36,5285) 2738.18,5208.18 cw(c2815,5131.36) M2.3@2815,5240 ; M2.3@2815,5285 2562.5,5032.5 ; v1@3630,4415 3730,4515 JTAG1.1@3730,4775 JTAG1.11@3730,4875 3730,4905 ; 3683.99,4951.01 cw(c3607.97,4875) JTAG1.11@3715.47,4875 ; JTAG1.1@3719.73,4764.73 cw(c3694.93,4739.93) 3730,4739.93 cw(c3765.07,4739.93) JTAG1.1@3740.27,4764.73 ; JTAG1.1@3719.73,4785.27 ccw(c3694.93,4810.07) 3730,4810.07 ccw(c3765.07,4810.07) JTAG1.1@3740.27,4785.27 ; JTAG1.11@3719.73,4864.73 cw(c3694.93,4839.93) 3730,4839.93 cw(c3765.07,4839.93) JTAG1.11@3740.27,4864.73 ; JTAG1.11@3720.99,4886.4 ccw(c3706.29,4905) 3730,4905 ; JTAG1.11@3739.01,4886.4 cw(c3753.71,4905) 3730,4905 ; M3.3@3810,5285 cw(c3701.36,5285) 3778.18,5208.18 cw(c3855,5131.36) M3.3@3855,5240 ; M3.3@3855,5330 ccw(c3855,5438.64) 3931.82,5361.82 ccw(c4008.64,5285) M3.3@3900,5285 ; 10K.2@5405,4637.6 10K.2@5530,4637.6 10K.2@5655,4637.6 5692.6,4637.6 5775,4720 5822.4,4720 C12.2@5830,4712.4 5835.28,4717.68 SD1.4@5835.28,4835 5835.28,4894.72 5600,5130 ; 10K.2@5658.94,4618.19 ccw(c5658.94,4652.59) 10K.2@5683.27,4628.27 ; 10K.2@5658.94,4648.19 ccw(c5658.94,4755.02) 5734.48,4679.48 ; 5782.15,4720 cw(c5782.15,4668.49) C12.2@5818.57,4704.91 ; 5805.93,4924.07 cw(c5746.38,4864.53) SD1.4@5830.59,4864.53 ; C12.2@5826.45,4719.89 ccw(c5805.14,4741.2) 5835.28,4741.2 ; C43.2@5980,3777.6 6082.6,3777.6 6435,4130 ; 10K.2@6100,4637.6 10K.2@6225,4637.6 6435,4637.6 ; v1(6475,3610) 6435,3650 6435,4130 ; v1(6840,3560) 6885,3515 7055,3515 7075,3535 BTN7970.3@7188.46,3535 ; v1(7070,4130) 7075,4135 U2.3@7188.46,4135 ; 1522.5,5032.5 2562.5,5032.5 ; 2562.5,5032.5 3602.5,5032.5 ; 3602.5,5032.5 3730,4905 ; 3602.5,5032.5 M3.3@3855,5285 4025,5455 5275,5455 5600,5130 ; 5600,5130 6300,5130 6435,4995 6435,4637.6 ; 6435,4130 6435,4637.6
  Bottom Layer w10: v1@3895,3545 cw(c3895,3532.93) 3903.54,3541.46 cw(c3912.07,3550) v1@3900,3550 ; v1(3895,3550) 4115,3330 v1(4115,3310) ; v1@4111.46,3313.54 ccw(c4102.93,3322.07) 4115,3322.07 ccw(c4127.07,3322.07) v1@4118.54,3313.54 ; v1(4590,3300) 4835,3300 v1(4955,3420) ; v1@4593.54,3296.46 cw(c4602.07,3287.93) 4602.07,3300 cw(c4602.07,3312.07) v1@4593.54,3303.54 ; v1@4930,3920 cw(c4917.93,3920) 4926.46,3911.46 cw(c4935,3902.93) v1@4935,3915 ; v1(4935,3920) 4910,3895 4910,3750 v1(4970,3690) ; v1@4950,3420 cw(c4937.93,3420) 4946.46,3411.46 cw(c4955,3402.93) v1@4955,3415 ; v1@4965,3690 ccw(c4952.93,3690) 4961.46,3698.54 ccw(c4970,3707.07) v1@4970,3695
  Bottom Layer w30: v1(1440,2745) 3V3.2@2215,2745 ; 3V3.1@2086.62,2734.73 ccw(c2061.82,2709.93) 2061.82,2745 ccw(c2061.82,2780.07) 3V3.1@2086.62,2755.27 ; 3V3.1@2096.89,2745 3V3.2@2196.89,2745 3V3.3@2296.89,2745 3V3.4@2396.89,2745 3V3.5@2496.89,2745 ; 3V3.2@2207.16,2734.73 cw(c2231.96,2709.93) 2231.96,2745 cw(c2231.96,2780.07) 3V3.2@2207.16,2755.27 ; 3V3.3@2286.62,2734.73 ccw(c2261.82,2709.93) 2261.82,2745 ccw(c2261.82,2780.07) 3V3.3@2286.62,2755.27 ; 3V3.3@2307.16,2734.73 cw(c2331.96,2709.93) 2331.96,2745 cw(c2331.96,2780.07) 3V3.3@2307.16,2755.27 ; 3V3.4@2386.62,2734.73 ccw(c2361.82,2709.93) 2361.82,2745 ccw(c2361.82,2780.07) 3V3.4@2386.62,2755.27 ; 3V3.4@2407.16,2734.73 cw(c2431.96,2709.93) 2431.96,2745 cw(c2431.96,2780.07) 3V3.4@2407.16,2755.27 ; 3V3.5@2486.62,2734.73 ccw(c2461.82,2709.93) 2461.82,2745 ccw(c2461.82,2780.07) 3V3.5@2486.62,2755.27 ; v1(3630,4420) 3905,4145 3905,3925 v1(3870,3890) ; JTAG1.1@3719.73,4764.73 cw(c3694.93,4739.93) 3730,4739.93 cw(c3765.07,4739.93) JTAG1.1@3740.27,4764.73 ; JTAG1.1@3730,4775 3730,4720 4090,4360 4130,4320 4290,4320 v1(4330,4360) v1(4500,4360) 4500,4349.75 4684.75,4165 v1(4975,4165) ; v1(6475,3610) 6795,3610 ; v1(6840,3560) 6840,3565 6795,3610 ; v1(7070,4130) 7045,4105 7045,3860 6795,3610 ; 2131.96,2745 ccw(c2131.96,2709.93) 2107.16,2734.73 cw(c2131.96,2709.93) 2131.96,2745 ; 2131.96,2745 cw(c2131.96,2780.07) 2107.16,2755.27 ccw(c2131.96,2780.07) 2131.96,2745 ; 2161.82,2745 ccw(c2161.82,2780.07) 2186.62,2755.27 cw(c2161.82,2780.07) 2161.82,2745 ; 2161.82,2745 cw(c2161.82,2709.93) 2186.62,2734.73 ccw(c2161.82,2709.93) 2161.82,2745
  other v1: 4070,4380
VREF: 3K3.1 106.2 C17.2 REF5025.6 TM7707.9 | length 1733.7
  Top Layer w20: REF5025.6@1664.36,3437 2427,3437 2683,3693 TM7707.9@2683,3932.69 ; 1751.98,3437 ccw(c1751.98,3476.68) 3K3.1@1780.04,3448.62 ; 1754.87,3437 cw(c1754.87,3401.4) 3K3.1@1780.04,3426.57 ; 3K3.1@1809.96,3426.57 cw(c1835.13,3401.4) 1835.13,3437 ; 3K3.1@1809.96,3448.62 ccw(c1838.02,3476.68) 1838.02,3437 ; 2282.21,3437 ccw(c2282.21,3498.74) 106.2@2325.86,3455.08 ; 2296.12,3437 cw(c2296.12,3394.94) 106.2@2325.86,3424.68 ; 106.2@2364.14,3424.68 cw(c2393.88,3394.94) 2393.88,3437 ; 106.2@2364.14,3455.08 ccw(c2407.79,3498.74) 2407.79,3437 ; C17.2@2666.57,3795.04 cw(c2626.92,3755.38) 2683,3755.38 ; C17.2@2666.57,3824.96 ccw(c2626.92,3864.62) 2683,3864.62
VT: 510K.1@1962.6,3770 LT1025.3 | length 374.8
  Top Layer w20: LT1025.3@1664.36,3812 1920.6,3812 510K.1@1962.6,3770 ; 1929.26,3803.34 ccw(c1962.6,3836.67) 510K.1@1962.6,3789.53 ; 510K.1@1938.77,3793.83 cw(c1918.87,3773.94) 510K.1@1947.01,3773.94
WHITE: 10K.1@1887.6,4385 102.2@1592.6,4095 910K.1@1747.4,4385 T1.2 | length 1016.9
  Top Layer w20: T1.2@1462,4087 1584.6,4087 102.2@1592.6,4095 ; T1.2@1475.81,4073.19 cw(c1509.14,4039.86) 1509.14,4087 cw(c1509.14,4134.14) T1.2@1475.81,4100.81 ; 1545.15,4087 ccw(c1545.15,4138.51) 102.2@1581.57,4102.09 ; 1564.77,4087 cw(c1564.77,4063.23) 102.2@1581.57,4080.04 ; 910K.1@1747.4,4385 10K.1@1887.6,4385 ; 910K.1@1758.43,4373.98 cw(c1785.04,4347.36) 1785.04,4385 cw(c1785.04,4422.64) 910K.1@1758.43,4396.02 ; 10K.1@1876.57,4373.98 ccw(c1849.96,4347.36) 1849.96,4385 ccw(c1849.96,4422.64) 10K.1@1876.57,4396.02
  Bottom Layer w20: T1.2@1462,4087 1462,4097 v1(1750,4385) ; T1.2@1462,4106.53 ccw(c1462,4129.53) 1478.26,4113.26 ; T1.2@1481.53,4087 cw(c1552.81,4087) 1502.41,4137.41
X1: 2.4576M.2 22pF.2@3087.6,4305 TM7707.2 | length 534.8
  Top Layer w20: TM7707.2@2983,4143.32 2983,4213 3085,4315 2.4576M.2@3085,4440 ; 3032.76,4262.76 cw(c3087.6,4207.91) 22pF.2@3087.6,4285.47 ; 2.4576M.2@3070.86,4425.86 cw(c3036.72,4391.72) 3085,4391.72 cw(c3133.28,4391.72) 2.4576M.2@3099.14,4425.86 ; 22pF.2@3076.57,4319.96 ccw(c3056.23,4340.3) 3085,4340.3 ; 3085,4352.85 ccw(c3131.51,4352.85) 22pF.2@3098.62,4319.96
X2: 2.4576M.1 22pF.2@2887.6,4305 TM7707.3 | length 510.7
  Top Layer w20: 2.4576M.1@2870.86,4425.86 cw(c2830.44,4385.44) 2887.6,4385.44 ; 22pF.2@2876.57,4290.04 cw(c2849.96,4263.42) 2887.6,4263.42 cw(c2925.24,4263.42) 22pF.2@2898.62,4290.04 ; 22pF.2@2876.57,4319.96 ccw(c2849.96,4346.58) 2887.6,4346.58 ccw(c2925.24,4346.58) 22pF.2@2898.62,4319.96 ; 2.4576M.1@2885,4440 2887.6,4437.4 2887.6,4300 2887.6,4262.4 2933,4217 TM7707.3@2933,4143.32 ; 2887.6,4397.99 cw(c2927.01,4397.99) 2.4576M.1@2899.14,4425.86
pads on no net: "POWER SWITCH.3" "POWER SWITCH.4" BTN7970.6 COM3.1 COM3.9 COM3.10 COM3.11 FFC-1.0-24.6 JTAG1.6 JTAG1.9 LM2596-ADJ.6 LT1025.1 LT1025.5 LT1025.6 LT1025.7 LT1025.8 MAX232.11 MAX232.12 MAX232.13 MAX232.14 OPA2376.5 OPA2376.6 OPA2376.7 P4.3 P5.3 P6.3 REF5025.1 REF5025.3 REF5025.5 REF5025.7 REF5025.8 SD1.10 SD1.11 STM32F103ZET6.6 STM32F103ZET6.32 U2.6

## Polygon pours and split planes (outlines as drawn)
GND on Top Layer "Bottom Layer-No Net" (solid, pour order 1000): 1062.99,5826.77 2047.24,5826.77 8779.53,5826.77 8779.53,1811.02 1496.06,1811.02 1062.99,1811.02
GND on Bottom Layer "Bottom Layer-No Net" (solid, pour order 1001): 1062.99,5826.77 8779.53,5826.77 8779.53,1811.02 1062.99,1811.02

## Keep-outs
Keep-Out Layer:
  lines w7.87: 1023.62,1771.65 8818.9,1771.65 8818.9,5866.14 1023.62,5866.14 1023.62,1771.65

## Other copper
Top Layer:
  rectangle net VDD: 1305,2630 1570,3265
  rectangle net VCC: 1645,2635 1920,3270

## Silkscreen, mask and mechanical layers (free items; w line width, h text height)
Top Overlay:
  text "GND" at 7865,5115 h30
  text "PWM" at 8075,5115 h30
  text "PWM" at 8545,5115 h30
  text "GND" at 8345,5110 h30
  text "VDD" at 3770,5070 h30
  text "PWM" at 3970,5070 h30
  text "DIR" at 4180,5070 h30
  text "VDD" at 2735,5065 h30
  text "PWM" at 2935,5065 h30
  text "DIR" at 3145,5065 h30
  text "12V" at 3365,5065 h30
  text "GND" at 3565,5065 h30
  text "VDD" at 1705,5060 h30
  text "PWM" at 1905,5060 h30
  text "DIR" at 2115,5060 h30
  text "12V" at 2330,5060 h30
  text "GND" at 2530,5060 h30
  text "12V" at 1300,5055 h30
  text "GND" at 1500,5055 h30
  text "BTN7970" at 7480,4385 h30
  text "WHITE" at 1110,4060 h30
  text "RED" at 1170,3950 h30
  text "+" at 7290,2840 h60
  text "-" at 7830,2830 h60
  text "12V" at 5730,2360 h60
  text "12V" at 6110,2360 h60
  text "GND" at 6105,2265 h60
  text "GND" at 5725,2260 h60